# Altium PCB PCB1.PcbDoc
Units mm, origin at the board's own origin, x right, y up, seen from the top; angles counter-clockwise.
Board outline 56.7 x 32.8 mm, 4 copper layers (Top Layer, Layer 1, Layer 2, Bottom Layer), stack 1.586 mm thick; 29 components, 50 nets, 204 pads, 110 vias.
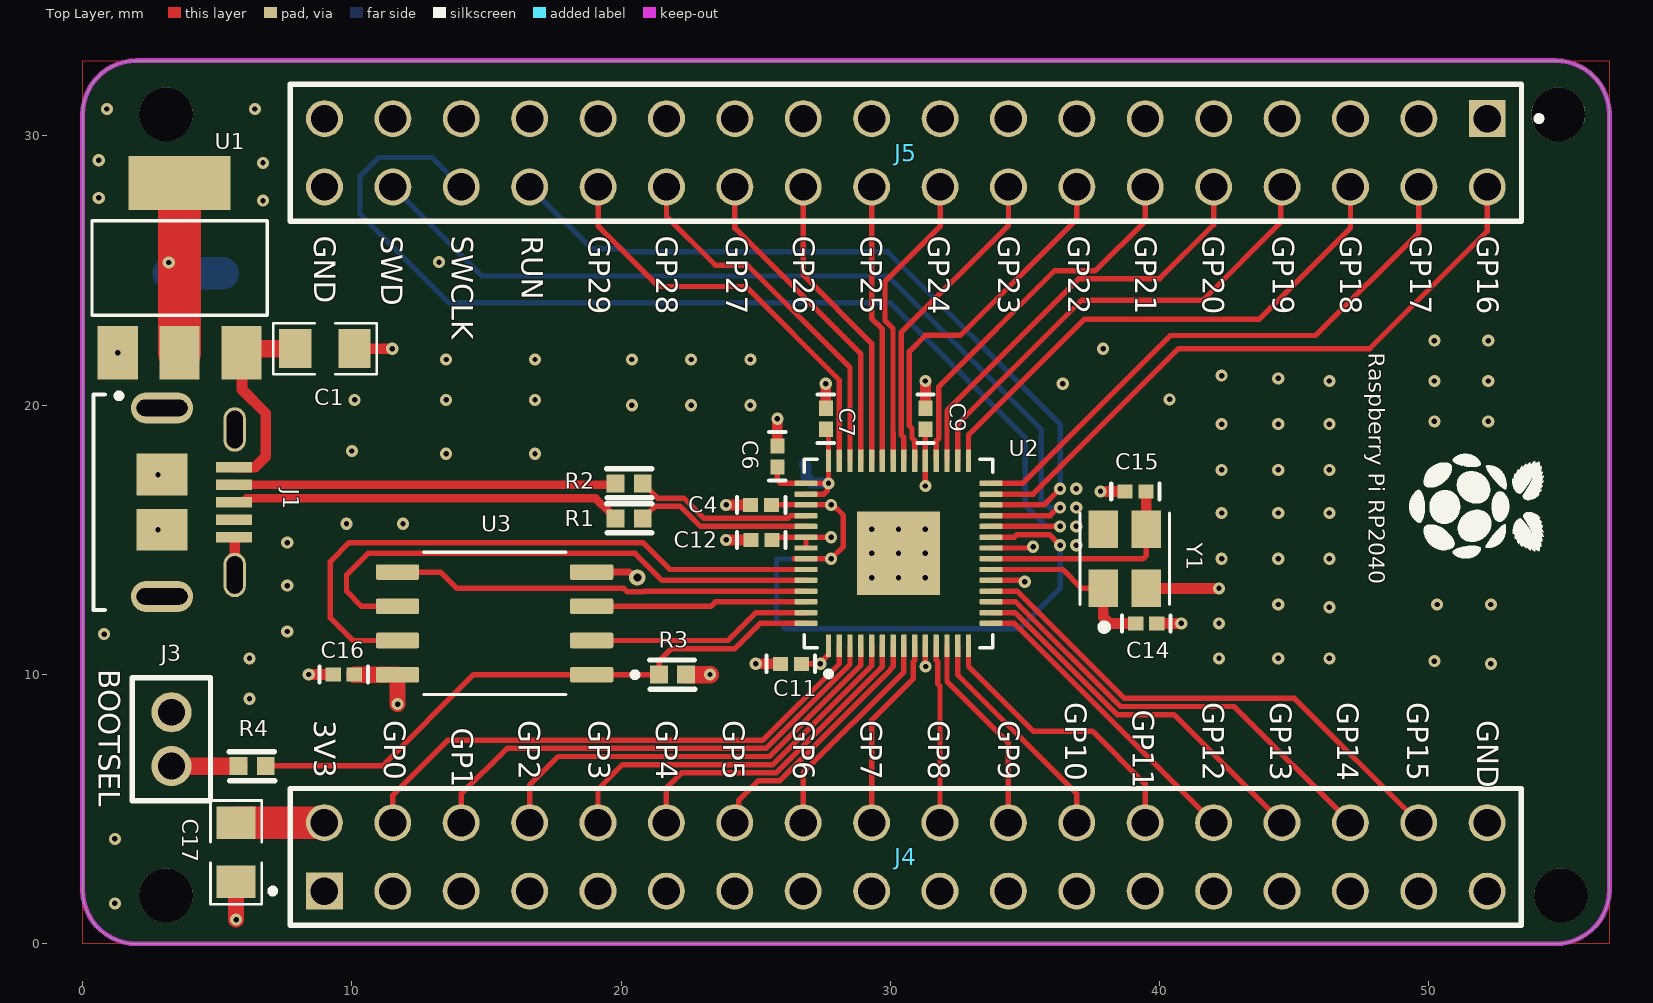
[diagram p0: Top Layer view]
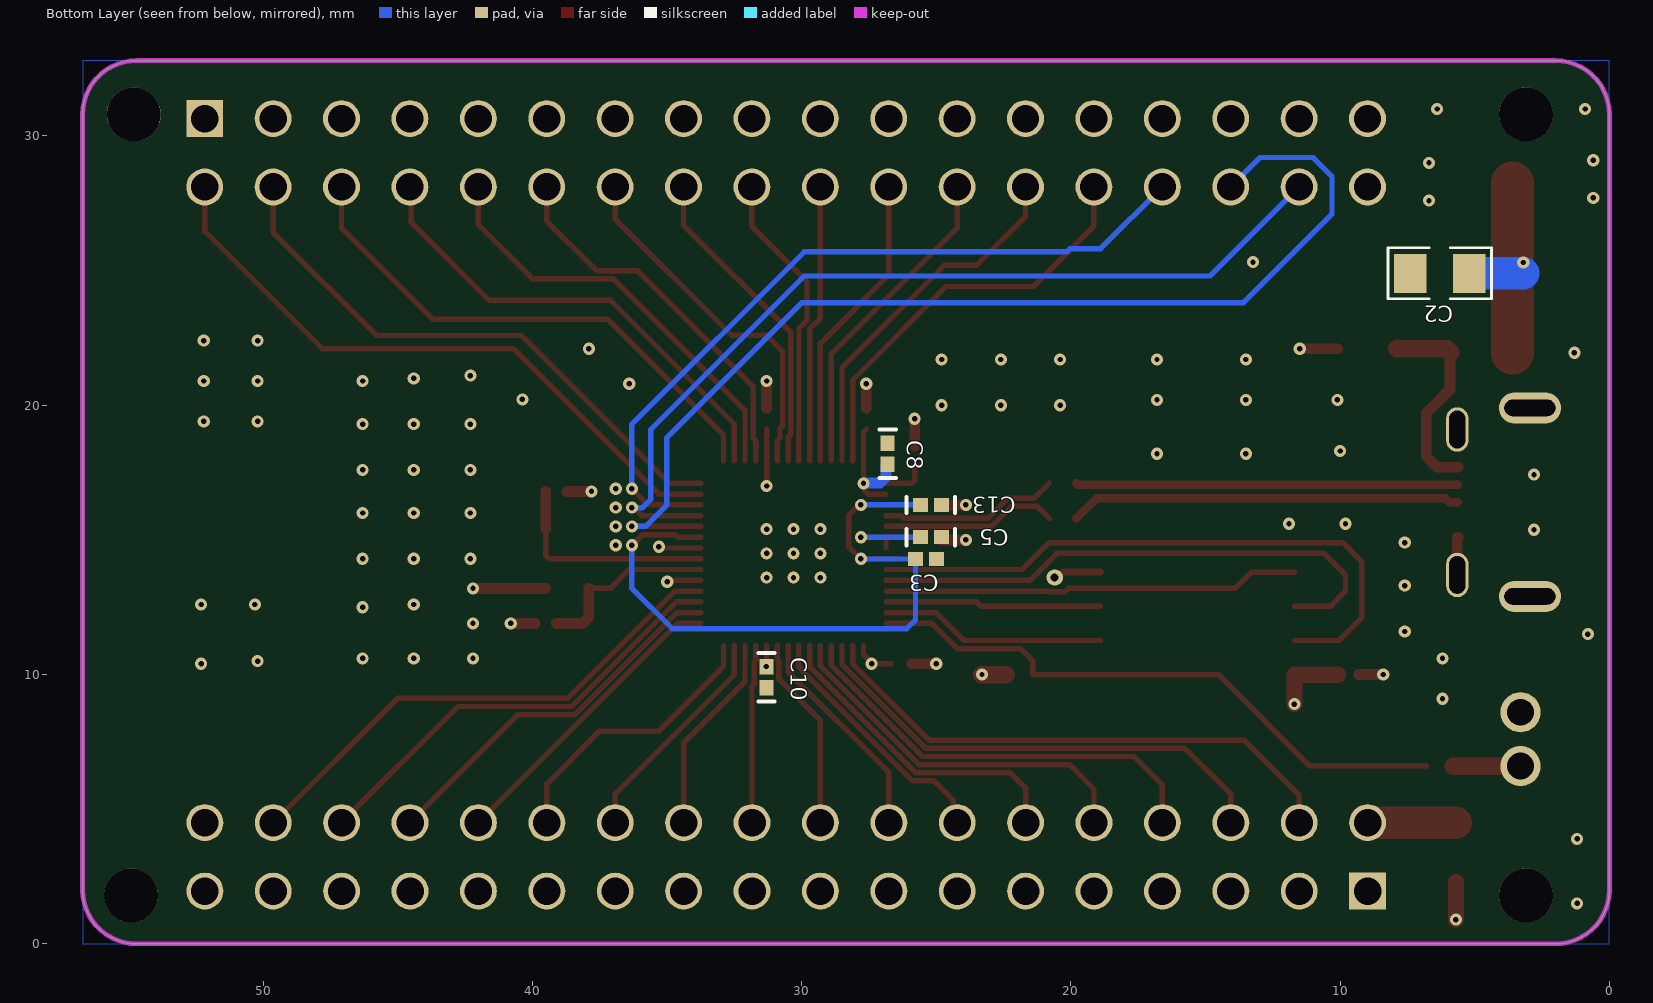
[diagram p1: Bottom Layer view, seen from below]
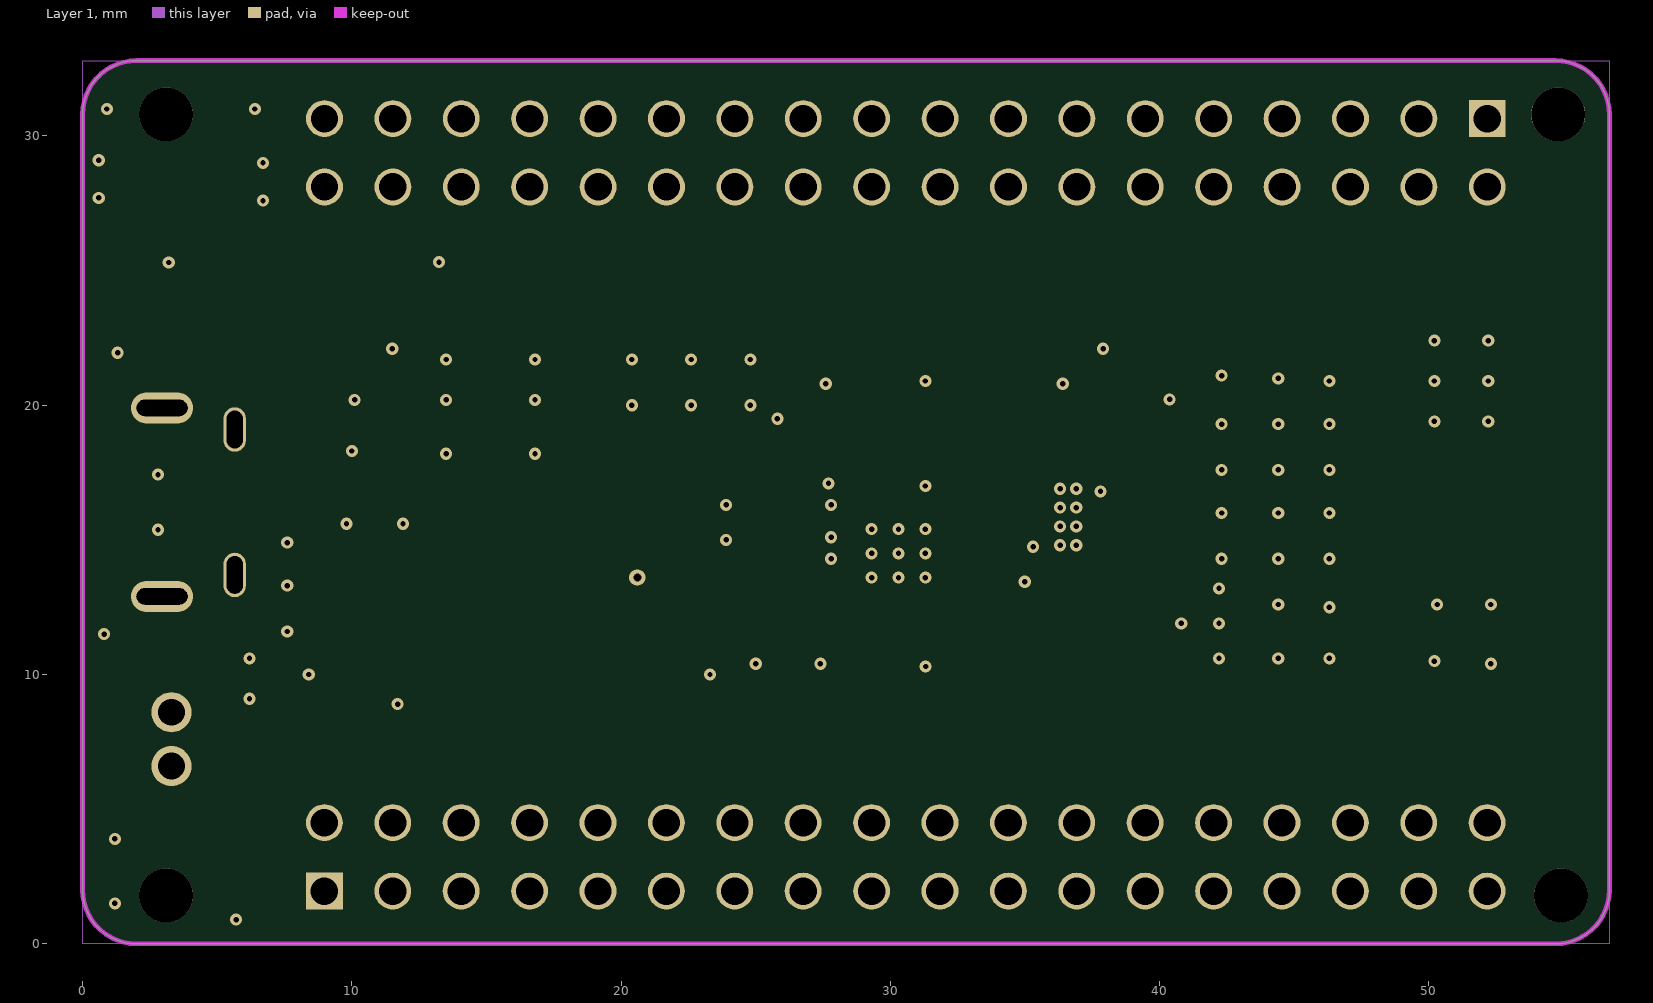
[diagram p2: Layer 1]
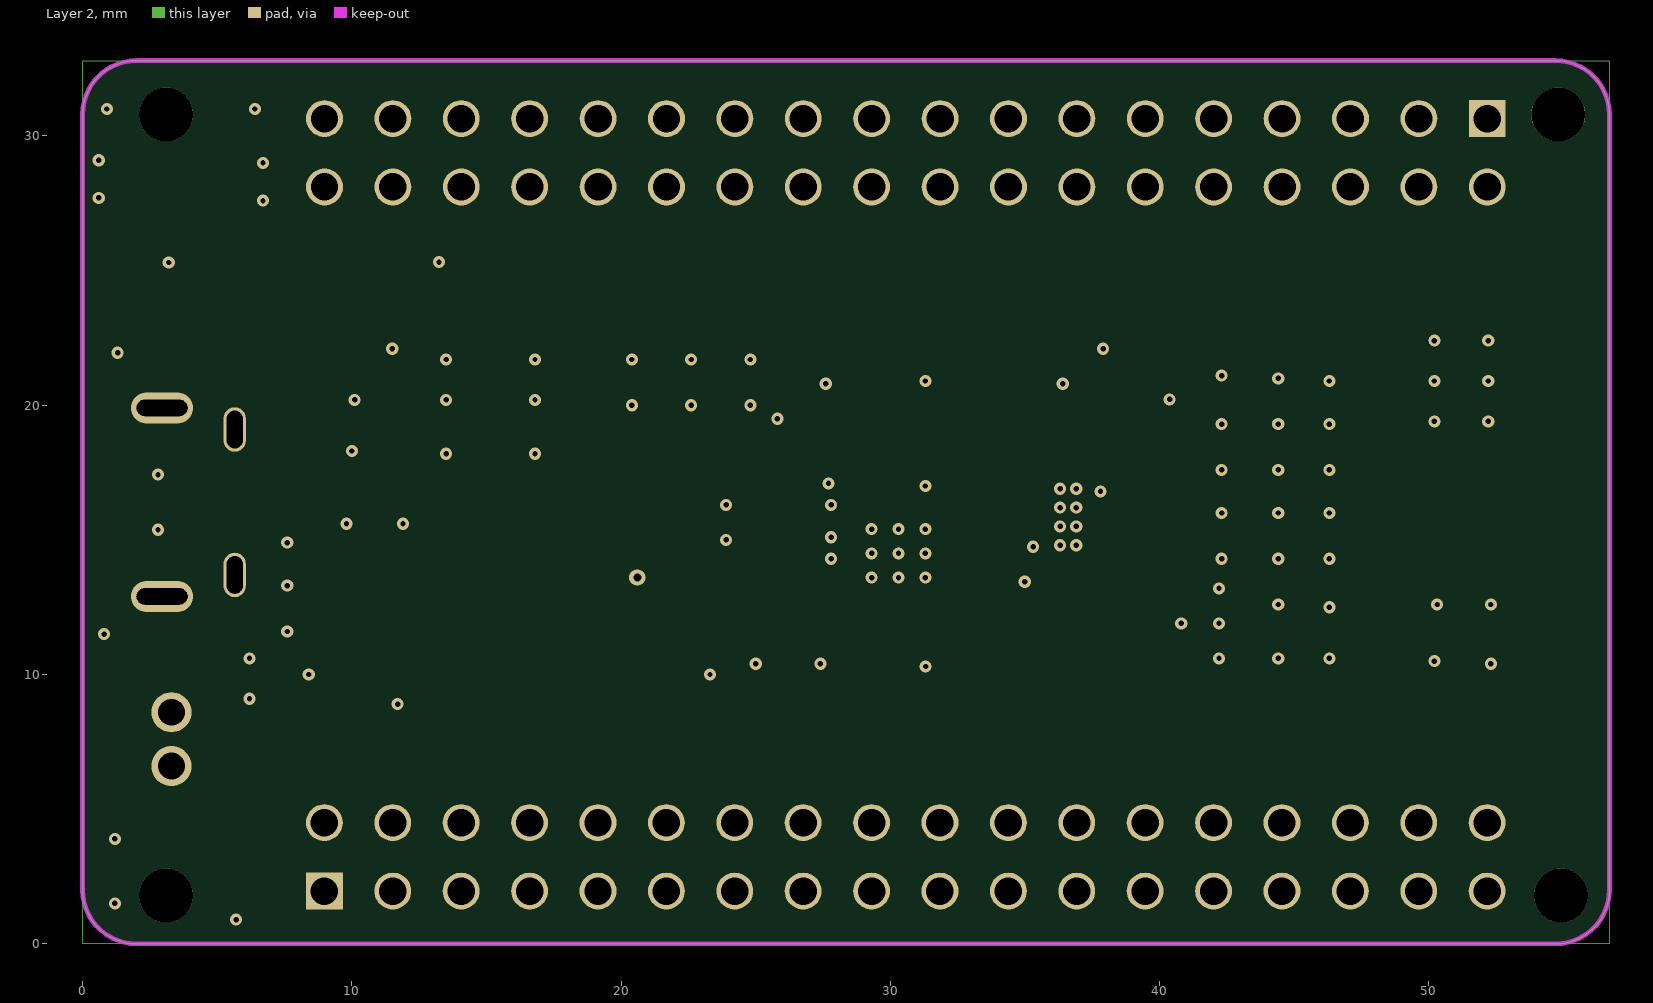
[diagram p3: Layer 2]
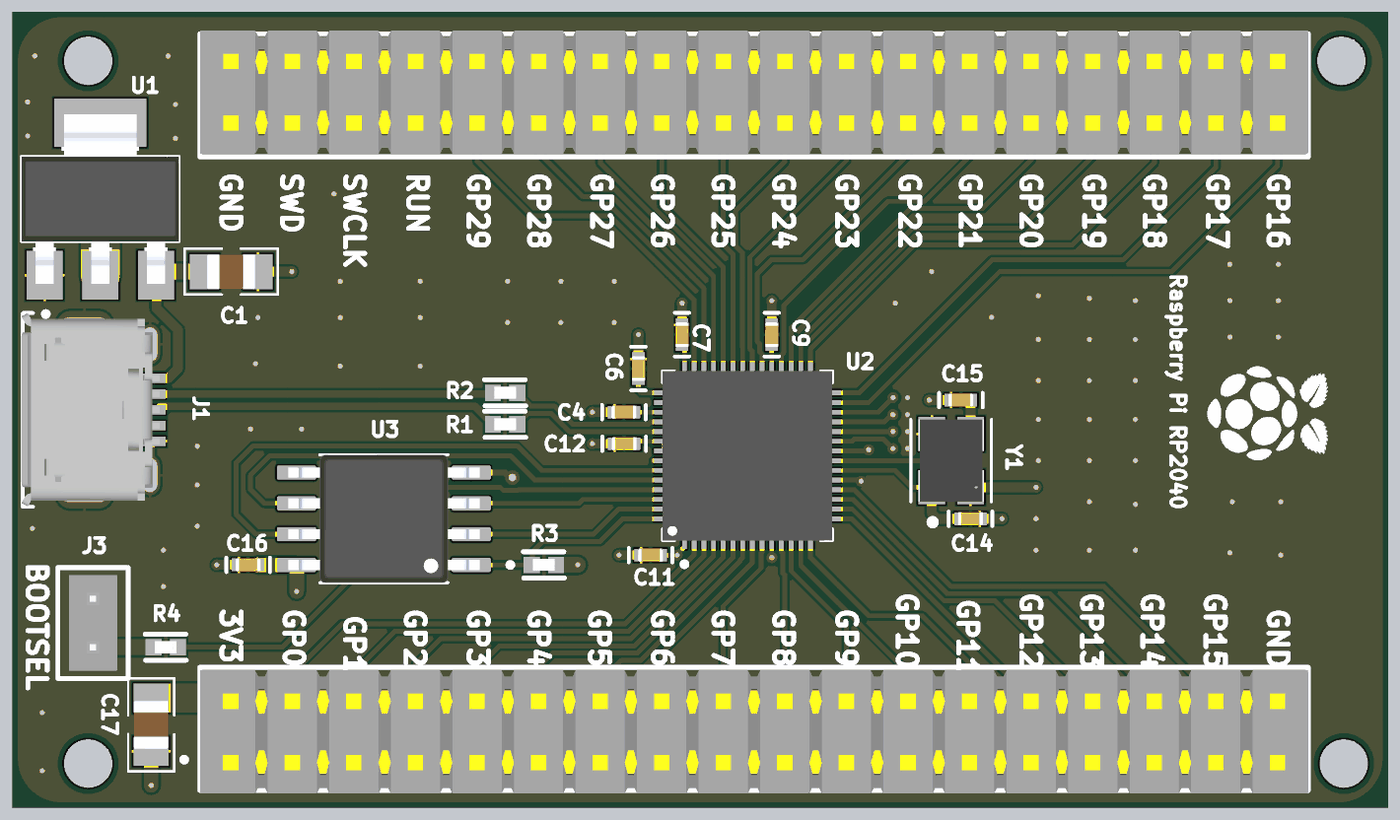
[diagram p4: 3D render of the assembled board from above, using the file's embedded part models]
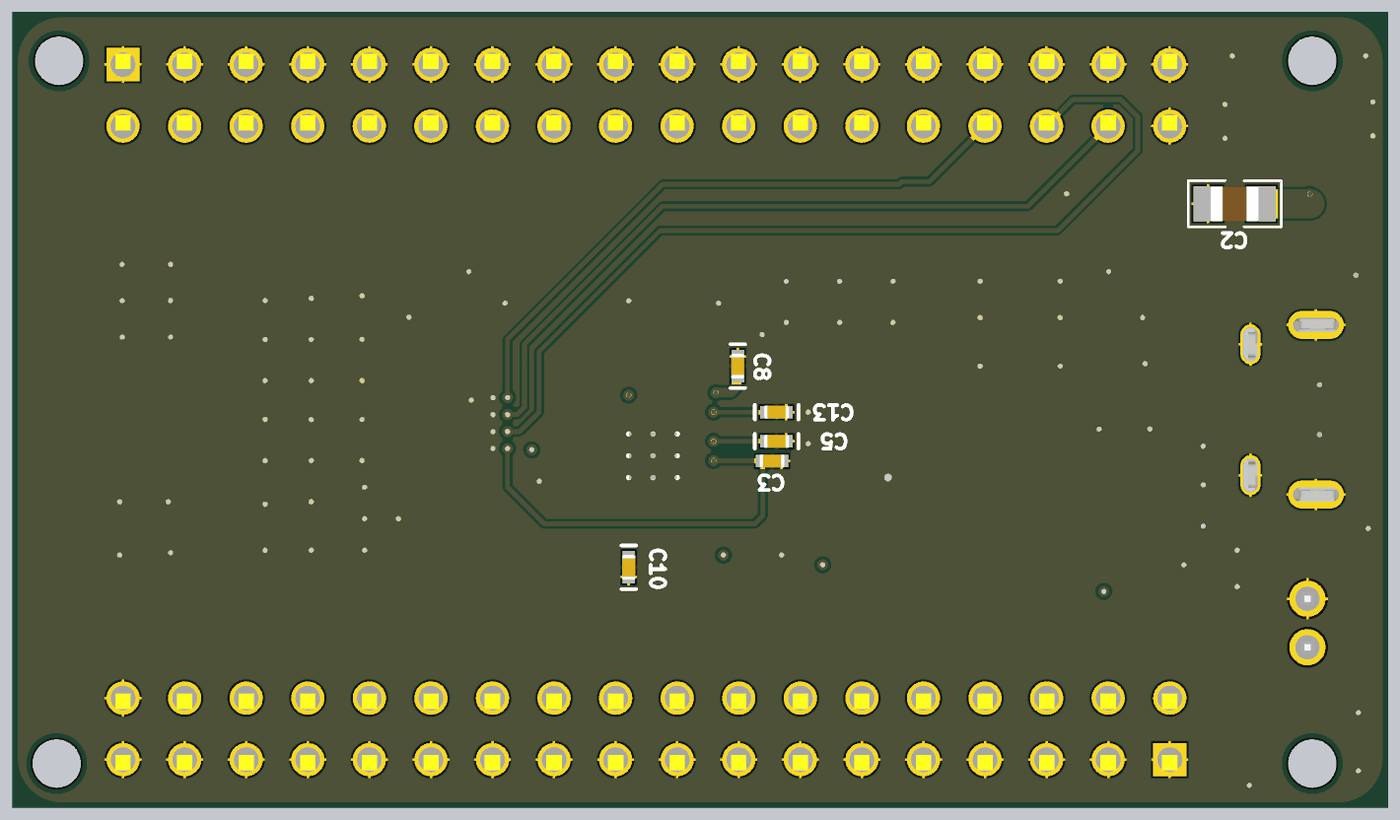
[diagram p5: 3D render of the assembled board from below, using the file's embedded part models]

## Layer stack, top to bottom
Top Solder: solder mask 0.0127, Solder Resist, Dk 3.8
Top Layer: signal copper 0.035
Dielectric 2: prepreg 0.2104, 7628, Dk 4.4
Layer 1: signal copper 0.0152
Dielectric 1: prepreg 1.065, FR-4, Dk 4.4
Layer 2: signal copper 0.0152
Dielectric 3: prepreg 0.2104, 7628, Dk 4.4
Bottom Layer: signal copper 0.035
Bottom Solder: solder mask 0.0127, Solder Resist, Dk 3.8

## Board outline
0,2 0,30.8 cw(c2,30.8) 2,32.8 54.7,32.8 cw(c54.7,30.8) 56.7,30.8 56.7,2 cw(c54.7,2) 54.7,0 2,0 cw(c2,2)

## Design rules (kind name [scope] priority, off if disabled: settings)
BoardOutlineClearance [All] p1: gap=0.2 ignorepadtopadclearanceinfootprint=FALSE
Clearance [All] p1: gap=0.102 ignorepadtopadclearanceinfootprint=FALSE except(0.127: Arc-Via Track-Via SMDPad-Via THPad-Via Via-Via Via-Fill Via-Poly Via-Region Via-Text; 0.25: Arc-Hole Track-Hole SMDPad-Hole THPad-Hole Via-Hole Fill-Hole Poly-Hole Region-Hole Text-Hole)
ComponentClearance [All] p1: gap=0.102 collisioncheckmode=3 verticalgap=0.102 showdistances=TRUE
DiffPairsRouting [InDifferentialPair('USB_D')] p1: maxlimit=0.2 minlimit=0.2 mostfreqgap=0.2 toplayer_maxgap=0.2 toplayer_prefgap=0.2 toplayer_minwidth=0.306 toplayer_maxwidth=0.306 toplayer_prefwidth=0.306 midlayer1_mingap=0.2 midlayer1_minwidth=0.215 midlayer1_maxwidth=0.215 midlayer1_prefwidth=0.215 midlayer2_mingap=0.2 midlayer2_minwidth=0.215 midlayer2_maxwidth=0.215 midlayer2_prefwidth=0.215 bottomlayer_maxgap=0.2 bottomlayer_prefgap=0.2 bottomlayer_minwidth=0.306 bottomlayer_maxwidth=0.306 bottomlayer_prefwidth=0.306 impedanceprofiledriven=TRUE impedanceprofileid={92C217A8-6386-4FA5-9285-B80EED019AAA} impedanceprofilevalue=90.000000 maxuncoupledlength=12.7
Height [All] p1: minheight=0 maxheight=1816.048 prefheight=12.7
HoleSize [All] p1: absolutevalues=TRUE maxlimit=6.3 minlimit=0.2 maxpercent=80.000 minpercent=20.000
HoleToHoleClearance [All] p1: gap=0.25 allowstackedmicrovias=FALSE
MinimumAnnularRing [All] p1: minimumring=0.076
MinimumSolderMaskSliver [All] p1: minsoldermaskwidth=0
PlaneClearance [All] p1: clearance=0.102
PlaneConnect PlaneConnectPowerPads [InPadClass('PowerPads')] p1: planeconnectstyle=Direct reliefexpansion=0.508 reliefentries=4 reliefconductorwidth=0.254 reliefairgap=0.254
PlaneConnect [All] p2: pad.planeconnectstyle=Relief pad.reliefexpansion=0.3 pad.reliefentries=4 pad.reliefconductorwidth=0.102 pad.reliefairgap=0.102 via.planeconnectstyle=Direct via.reliefexpansion=0.3 via.reliefentries=4 via.reliefconductorwidth=0.127 via.reliefairgap=0.127
PolygonConnect PolygonConnectPowerPads [All vs (InPadClass('PowerPads'))] p1: connectstyle=Direct reliefconductorwidth=0.254 reliefentries=4 polygonreliefangle="90 Angle" airgapwidth=0.254
PolygonConnect [All] p2: thpad.connectstyle=Relief thpad.reliefconductorwidth=0.102 thpad.reliefentries=4 thpad.polygonreliefangle="90 Angle" thpad.airgapwidth=0.102 smdpad.connectstyle=Relief smdpad.reliefconductorwidth=0.102 smdpad.reliefentries=4 smdpad.polygonreliefangle="90 Angle" smdpad.airgapwidth=0.102 via.connectstyle=Direct via.reliefconductorwidth=0.127 via.reliefentries=4 via.polygonreliefangle="90 Angle" via.airgapwidth=0.127
RoutingVias [All] p1: holewidth=0.2 width=0.45 viastyle="Through Hole" minholewidth=0.2 minwidth=0.45 maxholewidth=6.3 maxwidth=6.55
SilkToSilkClearance [All] p1: silktosilkclearance=0
SilkToSolderMaskClearance [IsPad] p1: minsilkscreentomaskgap=0.102 clearancetoexposedcopper=TRUE
SolderMaskExpansion [All] p1: expansion=0.075 istentingtop=FALSE
SupplyNets "Schematic Supply Nets_3" [InNet('GND')] p1: voltage=0.000
SupplyNets "Schematic Supply Nets_2" [InNet('+3V3')] p2: voltage=0.000
SupplyNets "Schematic Supply Nets_1" [InNet('+1V1')] p3: voltage=0.000
SupplyNets "Schematic Supply Nets" [InNet('VBUS')] p4: voltage=0.000
Width [All] p1: maxlimit=1816.048 minlimit=0.102 preferedwidth=0.102
20 further rules are at their usual default settings.

## Classes and differential pairs
differential pair class USB: USB_D USB_RES_D
net class GPIO[0..29]: GPIO0 GPIO1 GPIO2 GPIO3 GPIO4 GPIO5 GPIO6 GPIO7 GPIO8 GPIO9 GPIO10 GPIO11 GPIO12 GPIO13 GPIO14 GPIO15 GPIO16 GPIO17 GPIO18 GPIO19 GPIO20 GPIO21 GPIO22 GPIO23 GPIO24 GPIO25 GPIO26 GPIO27 GPIO28 GPIO29
component class U_Supply: C1 C2 J1 U1
component class U_MCU: C3 C5 C6 C7 C9 C10 C11 C12 C13 C14 C15 R1 R2 Y1
component class U_Flash: C16 J3 R3 R4 U3
component class U_Connectors: C17 J4 J5
differential pair USB_RES_D: +USB_RES_D_P -USB_RES_D_N
differential pair USB_D: +USB_D_P -USB_D_N

## Components (designator, comment, footprint, x,y, rotation, side; value= is the part's Value field where it differs from the comment)
C1 "10u" VJ0805 9,22.1 r180 top value=10uF
C2 "10u" VJ0805 6.3,24.9 r180 bottom value=10uF
C3 "100n" "0402 CAP" 25.386,14.285 r0 bottom value=100nF
C4 "100n" "0402 CAP" 25.2,16.3 r0 top value=100nF
C5 "100n" "0402 CAP" 25.2,15.1 r0 bottom value=100nF
C6 "100n" "0402 CAP" 25.8,18.1 r270 top value=100nF
C7 "100n" "0402 CAP" 27.6,19.5 r270 top value=100nF
C8 "100n" "0402 CAP" 26.8,18.2 r270 bottom value=100nF
C9 "100n" "0402 CAP" 31.3,19.5 r270 top value=100nF
C10 "100n" "0402 CAP" 31.3,9.9 r90 bottom value=100nF
C11 "100n" "0402 CAP" 26.3,10.4 r0 top value=100nF
C12 "1u" "0402 CAP" 25.21,15 r0 top value=1uF
C13 "1u" "0402 CAP" 25.2,16.3 r0 bottom value=1uF
C14 "15p" "0402 CAP" 39.5,11.9 r0 top value=15pF
C15 "15p" "0402 CAP" 39.1,16.8 r180 top value=15pF
C16 "100n" "0402 CAP" 9.7,10 r0 top value=100nF
C17 "10u" VJ0805 5.7,3.4 r90 top value=10uF
J1 "USB_B_Micro" MOLEX_1050170002 1.1,16.4 r270 top
J3 "2 Position male pin header" SAMTEC-TMM-101-03-X-D 3.3,7.6 r0 top
J4 "MTSW-118-07-T-D-150" SAMTEC_MTSW-118-07-T-D-150 8.98,1.96 r0 top
J5 "MTSW-118-07-T-D-150" SAMTEC_MTSW-118-07-T-D-150 52.164,30.646 r180 top
R1 "27R" "0402 RES" 20.3,15.8 r180 top
R2 "27R" "0402 RES" 20.3,17.1 r180 top
R3 "10k" "0402 RES" 21.9,10 r0 top
R4 "1k" "0402 RES" 6.3,6.6 r0 top value=1kR
U1 "NCP1117-3.3" VREG_NCP1117STAT3 3.6,25.1 r90 top
U2 "RP2040" QFN40P700X700X90-57N 30.3,14.5 r90 top
U3 "W25Q128JVSIQ" SOIC127P790X216-8N 15.3,11.9 r180 top
Y1 "ABM8-272-T3" ABM8-272-T3 38.7,14.3 r90 top

## Footprints (in the part's own frame and the unit in brackets; to place one, negate y for a bottom-side part, rotate by r counter-clockwise, add the part's x,y. Pads: shape width x height; smd on the part's side, far side on the other; paste and mask are expansions set on the pad)
"0402 CAP" [mm]
  rect 0.56x0.52 smd: 1(-0.39,0) 2(0.39,0)
  body extent -0.53,-0.28 0.53,0.28, height 0.55
"0402 RES" [mm]
  rect 0.668x0.672 smd paste+0 mask+0: 1(-0.502,0) 2(0.502,0)
  silkscreen extent -0.85,-0.54 0.84,0.54, body extent -1.04,-0.54 1.04,0.54, height 0.25
ABM8-272-T3 [mm]
  rect 1.4x1.1 smd: 1(-1.1,0.8) 2(-1.1,-0.8) 3(1.1,-0.8) 4(1.1,0.8)
  silkscreen extent -2.67,-1.66 1.7,1.66, body extent -1.7,-1.35 1.7,1.35, height 0.76
MOLEX_1050170002 [mm]
  rect 0.4x1.35 smd mask+0.064: 1(-1.3,4.525) 2(-0.65,4.525) 3(0,4.525) 4(0.65,4.525) 5(1.3,4.525)
  oval 1.65x0.825 hole 0.6 slot 1.4 at 0 deg mask+0: SH1(-2.7,4.55) SH3(2.7,4.55)
  oval 1.15x2.3 hole 0.6 slot 1.9 at 90 deg mask+0: SH2(-3.5,1.85) SH4(3.5,1.85)
  rect 1.55x1.9 smd mask+0.064: SH5(-1.025,1.85) SH6(1.025,1.85)
  silkscreen extent -3.99,-0.7 4,-0.28, body extent -4,-0.76 4,4.95, height 2.75
QFN40P700X700X90-57N [mm]
  rrect25% 0.84x0.2 smd: 1(-3.435,2.6) 2(-3.435,2.2) 3(-3.435,1.8) 4(-3.435,1.4) 5(-3.435,1) 6(-3.435,0.6) 7(-3.435,0.2) 8(-3.435,-0.2) 9(-3.435,-0.6) 10(-3.435,-1) 11(-3.435,-1.4) 12(-3.435,-1.8) 13(-3.435,-2.2) 14(-3.435,-2.6) 29(3.435,-2.6) 30(3.435,-2.2) 31(3.435,-1.8) 32(3.435,-1.4) 33(3.435,-1) 34(3.435,-0.6) 35(3.435,-0.2) 36(3.435,0.2) 37(3.435,0.6) 38(3.435,1) 39(3.435,1.4) 40(3.435,1.8) 41(3.435,2.2) 42(3.435,2.6)
  rrect25% 0.2x0.84 smd: 15(-2.6,-3.435) 16(-2.2,-3.435) 17(-1.8,-3.435) 18(-1.4,-3.435) 19(-1,-3.435) 20(-0.6,-3.435) 21(-0.2,-3.435) 22(0.2,-3.435) 23(0.6,-3.435) 24(1,-3.435) 25(1.4,-3.435) 26(1.8,-3.435) 27(2.2,-3.435) 28(2.6,-3.435) 43(2.6,3.435) 44(2.2,3.435) 45(1.8,3.435) 46(1.4,3.435) 47(1,3.435) 48(0.6,3.435) 49(0.2,3.435) 50(-0.2,3.435) 51(-0.6,3.435) 52(-1,3.435) 53(-1.4,3.435) 54(-1.8,3.435) 55(-2.2,3.435) 56(-2.6,3.435)
  rect 3.1x3.1 smd paste-0.57: 57(0,0)
  silkscreen extent -4.57,-3.5 3.5,3.5, body extent -3.5,-3.5 3.5,3.5, height 0.9
SAMTEC-TMM-101-03-X-D [mm]
  round 1.49 hole 1: 1(0,-1) 2(0,1)
  silkscreen extent -1.45,-2.29 1.45,2.29, body extent -1,-1.97 1,1.97, height 5.51
SAMTEC_MTSW-118-07-T-D-150 [mm]
  rect 1.37x1.37 hole 1.02: 01(0,0)
  round 1.37 hole 1.02: 02(0,2.54) 03(2.54,0) 04(2.54,2.54) 05(5.08,0) 06(5.08,2.54) 07(7.62,0) 08(7.62,2.54) 09(10.16,0) 10(10.16,2.54) 11(12.7,0) 12(12.7,2.54) 13(15.24,0) 14(15.24,2.54) 15(17.78,0) 16(17.78,2.54) 17(20.32,0) 18(20.32,2.54) 19(22.86,0) 20(22.86,2.54) 21(25.4,0) 22(25.4,2.54) 23(27.94,0) 24(27.94,2.54) 25(30.48,0) 26(30.48,2.54) 27(33.02,0) 28(33.02,2.54) 29(35.56,0) 30(35.56,2.54) 31(38.1,0) 32(38.1,2.54) 33(40.64,0) 34(40.64,2.54) 35(43.18,0) 36(43.18,2.54)
  silkscreen extent -2.02,-1.27 44.45,3.81, body extent -1.27,-1.4 44.45,3.68, height 6.35
SOIC127P790X216-8N [mm]
  rrect25% 1.61x0.58 smd: 1(-3.605,1.905) 2(-3.605,0.635) 3(-3.605,-0.635) 4(-3.605,-1.905) 5(3.605,-1.905) 6(3.605,-0.635) 7(3.605,0.635) 8(3.605,1.905)
  silkscreen extent -5.32,-2.64 2.64,2.64, body extent -3.95,-2.64 3.95,2.64, height 2.16
VJ0805 [mm] "General footprint for 2012(0805) SMD Capacitors"
  rect 1.2x1.45 smd: 1(-1.1,0) 2(1.1,0)
  silkscreen extent -1.92,-0.95 1.92,0.95, body extent -1,-0.72 1,0.72, height 1.22
VREG_NCP1117STAT3 [mm]
  rect 2x1.5 smd: 1(-3.15,2.3) 2(-3.15,0) 3(-3.15,-2.3)
  rect 2x3.8 smd: 4(3.15,0)
  silkscreen extent -4.85,-3.25 1.75,3.25, body extent -3.5,-3.25 3.5,3.25, height 1.8

## Part data
C1 C2 C17: library part "0805 SMD Capacitor", "Ceramic Capacitor, Multilayer, Ceramic, 25V, 10% +Tol, 10% -Tol, X5R, 15% TC, 10uF, Surface Mount, 0805", Capacitor Type=Ceramic, Case/Package=0805, Manufacturer=Murata, Manufacturer Part Number=GRM21BR61E106KA73K, Max Operating Temperature=85°C, Min Operating Temperature=-55°C, Package Shape=Rectangular, Package Style=SMTMeter, Rated DC Voltage (URdc)=25V, Supplier Part Number=9092991, Temperature Characteristics Code=X5R, Tolerance  (fill in as +-)=10%, Category="Ceramic Capacitors", ComponentLink1Description=Link, ComponentLink2Description=https://datasheet.ciiva.com:443/pdfs/VipMasterIC/IC/MURE/MURE-S-A0004349797/MURE-S-A0004361627-1.pdf?src-supplier=IHS+Markit, ComponentLink2URL=https://datasheet.ciiva.com:443/pdfs/VipMasterIC/IC/MURE/MURE-S-A0004349797/MURE-S-A0004361627-1.pdf?src-supplier=IHS+Markit, ComponentLink3Description=http://www.mouser.com/ds/2/281/c02e-2905.pdf?src-supplier=Mouser, ComponentLink3URL=http://www.mouser.com/ds/2/281/c02e-2905.pdf?src-supplier=Mouser, ComponentLink4Description=https://datasheet.octopart.com/GRM21BR61E106KA73K-Murata-datasheet-149523495.pdf?src-supplier=Newark, ComponentLink4URL=https://datasheet.octopart.com/GRM21BR61E106KA73K-Murata-datasheet-149523495.pdf?src-supplier=Newark, ComponentLink5Description=https://datasheet.octopart.com/GRM21BR61E106KA73K-Murata-datasheet-99353849.pdf?src-supplier=Future+Electronics, ComponentLink5URL=https://datasheet.octopart.com/GRM21BR61E106KA73K-Murata-datasheet-99353849.pdf?src-supplier=Future+Electronics, ComponentLink6Description=http://search.murata.co.jp/Ceramy/image/img/A01X/G101/ENG/GRM21BR61E106KA73-01.pdf?src-supplier=Digikey, ComponentLink6URL=http://search.murata.co.jp/Ceramy/image/img/A01X/G101/ENG/GRM21BR61E106KA73-01.pdf?src-supplier=Digikey, ComponentLink7Description=https://search.murata.co.jp/Ceramy/image/img/A01X/G101/ENG/GRM21BR61E106KA73-01.pdf?src-supplier=Digikey, ComponentLink7URL=https://search.murata.co.jp/Ceramy/image/img/A01X/G101/ENG/GRM21BR61E106KA73-01.pdf?src-supplier=Digikey, ComponentLink8Description=https://datasheet.octopart.com/GRM21BR61E106KA73K-Murata-datasheet-165579666.pdf?src-supplier=TME, ComponentLink8URL=https://datasheet.octopart.com/GRM21BR61E106KA73K-Murata-datasheet-165579666.pdf?src-supplier=TME, Dielectric Material=Ceramic, Height=1.25mm, JESD-609 Code=e3, Length=2mm, Mounting Technology="Surface Mount", Multilayer=Yes, Packaging="Tape and Reel", Pins=2, Pricing="10000=0.0248, 20000=0.0245, 30000=0.0242, 40000=0.0241, 50000=0.0236 (USD)", Reach SVHC Compliant=Yes, RoHS=Yes, RoHS Compliant=Yes, Stock=40000, Supplier="Future Electronics", Terminal Finish=Nickel, Termination=Wraparound, Tolerance (fill in as +-)=10%, Width=1.25mm
C3 C4 C5 C6 C7 C8 C9 C10 C11 C16: library part "0402 SMD Capacitor", "Ceramic Capacitor, Multilayer, Ceramic, 16V, 10% +Tol, 10% -Tol, X7R, 15% TC, 0.1uF, Surface Mount, 0805", Capacitor Type=Ceramic, Case/Package=0805, Manufacturer=KEMET, Manufacturer Part Number=C0805C104K4RACTU, Max Operating Temperature=125°C, Min Operating Temperature=-55°C, Package Shape=Rectangular, Rated DC Voltage (URdc)=16V, Supplier Part Number=80-C0805C104K4R, Temperature Characteristics Code=X7R, Tolerance  (fill in as +-)=10%, Category="Ceramic Capacitors", ComponentLink1Description=Link, ComponentLink2Description=https://datasheet.ciiva.com:443/pdfs/VipMasterIC/IC/KEME/KEME-S-A0006434815/KEME-S-A0006434815-1.pdf?src-supplier=IHS+Markit, ComponentLink2URL=https://datasheet.ciiva.com:443/pdfs/VipMasterIC/IC/KEME/KEME-S-A0006434815/KEME-S-A0006434815-1.pdf?src-supplier=IHS+Markit, ComponentLink3Description=https://datasheet.ciiva.com/46443/1851736-46443711.pdf?src-supplier=Element14, ComponentLink3URL=https://datasheet.ciiva.com/46443/1851736-46443711.pdf?src-supplier=Element14, ComponentLink4Description=https://datasheet.ciiva.com/46443/1851736-46443710.pdf?src-supplier=Element14, ComponentLink4URL=https://datasheet.ciiva.com/46443/1851736-46443710.pdf?src-supplier=Element14, Dielectric Material=Ceramic, JESD-609 Code=e3, Mounting Technology="Surface Mount", Multilayer=Yes, Packaging="Tape and Reel", Pins=2, Pricing="1=0.16, 10=0.078, 50=0.078, 100=0.045, 1000=0.034, 10000=0.024 (USD)", Reach SVHC Compliant=Yes, RoHS=Yes, RoHS Compliant=Yes, Stock=114893, Supplier=Mouser, Terminal Finish=Nickel, Termination=Wraparound, Tolerance (fill in as +-)=10%
C12 C13: library part "0402 SMD Capacitor", "Ceramic Capacitor, Multilayer, Ceramic, 16V, 10% +Tol, 10% -Tol, X7R, 15% TC, 1uF, Surface Mount, 0805", Capacitor Type=Ceramic, Case/Package=0805, Manufacturer=KEMET, Manufacturer Part Number=C0805C105K4RACTU, Max Operating Temperature=125°C, Min Operating Temperature=-55°C, Package Shape=Rectangular, Package Style=SMTMeter, Rated DC Voltage (URdc)=16V, Supplier Part Number=80-C0805C105K4R, Temperature Characteristics Code=X7R, Tolerance  (fill in as +-)=10%, Category="Ceramic Capacitors", ComponentLink1Description=Link, ComponentLink2Description=https://datasheet.ciiva.com:443/pdfs/VipMasterIC/IC/KEME/KEME-S-A0008991654/KEME-S-A0008991654-1.pdf?src-supplier=IHS+Markit, ComponentLink2URL=https://datasheet.ciiva.com:443/pdfs/VipMasterIC/IC/KEME/KEME-S-A0008991654/KEME-S-A0008991654-1.pdf?src-supplier=IHS+Markit, ComponentLink3Description=https://datasheet.ciiva.com/6074/1722731-6074364.pdf?src-supplier=Farnell, ComponentLink3URL=https://datasheet.ciiva.com/6074/1722731-6074364.pdf?src-supplier=Farnell, ComponentLink4Description=https://datasheet.ciiva.com/28692/1851736-28692942.pdf?src-supplier=Element14, ComponentLink4URL=https://datasheet.ciiva.com/28692/1851736-28692942.pdf?src-supplier=Element14, ComponentLink5Description=https://datasheet.ciiva.com/14585/70095383-14585511.pdf?src-supplier=Allied+Electronics, ComponentLink5URL=https://datasheet.ciiva.com/14585/70095383-14585511.pdf?src-supplier=Allied+Electronics, ComponentLink6Description=https://datasheet.ciiva.com/14603/70095383-14603388.pdf?src-supplier=Allied+Electronics, ComponentLink6URL=https://datasheet.ciiva.com/14603/70095383-14603388.pdf?src-supplier=Allied+Electronics, ComponentLink7Description=https://datasheet.ciiva.com/45846/docfinderpartnumberc0402c102k5ractu-45846934.pdf?src-supplier=Onlinecomponents.com, ComponentLink7URL=https://datasheet.ciiva.com/45846/docfinderpartnumberc0402c102k5ractu-45846934.pdf?src-supplier=Onlinecomponents.com, Dielectric Material=Ceramic, Height=0.9mm, JESD-609 Code=e3, Length=2mm, Mounting Technology="Surface Mount", Multilayer=Yes, Packaging="Tape and Reel", Pins=2, Pricing="1=0.11, 10=0.07, 50=0.07, 100=0.046, 1000=0.041, 10000=0.018 (USD)", Reach SVHC Compliant=Yes, RoHS=Yes, RoHS Compliant=Yes, Stock=298617, Supplier=Mouser, Terminal Finish=Nickel, Termination=Wraparound, Tolerance (fill in as +-)=10%, Width=1.25mm
C14 C15: library part "0402 SMD Capacitor", "Ceramic Capacitor, Multilayer, Ceramic, 50V, 1% +Tol, 1% -Tol, C0G, 30ppm/Cel TC, 0.000015uF, Surface Mount, 0805", Capacitor Type=Ceramic, Case/Package=0805, Manufacturer=Yageo, Manufacturer Part Number=CC0805FRNPO9BN150, Max Operating Temperature=125°C, Min Operating Temperature=-55°C, Package Shape=Rectangular, Package Style=SMTMeter, Rated DC Voltage (URdc)=50V, Supplier Part Number=8396681, Temperature Characteristics Code=C0G, Tolerance  (fill in as +-)=1%, Category="Ceramic Capacitors", ComponentLink1Description=Link, ComponentLink2Description=https://datasheet.ciiva.com:443/pdfs/VipMasterIC/IC/YAGO/YAGO-S-A0009251638/YAGO-S-A0009251638-1.pdf?src-supplier=IHS+Markit, ComponentLink2URL=https://datasheet.ciiva.com:443/pdfs/VipMasterIC/IC/YAGO/YAGO-S-A0009251638/YAGO-S-A0009251638-1.pdf?src-supplier=IHS+Markit, ComponentLink3Description=https://datasheet.ciiva.com/26862/getdatasheetpartid-251794-26862901.pdf?src-supplier=Verical, ComponentLink3URL=https://datasheet.ciiva.com/26862/getdatasheetpartid-251794-26862901.pdf?src-supplier=Verical, Dielectric Material=Ceramic, Height=0.6mm, JESD-609 Code=e3, Length=2mm, Mounting Technology="Surface Mount", Multilayer=Yes, Packaging="Tape and Reel", Pins=2, Pricing="4000=0.0258, 12000=0.0252, 20000=0.0249, 60000=0.0243, 100000=0.0238 (USD)", Reach SVHC Compliant=Yes, RoHS=Yes, RoHS Compliant=Yes, Stock=8000, Supplier="Future Electronics", Terminal Finish=Nickel, Termination=Wraparound, Tolerance (fill in as +-)=1%, Width=1.25mm
J1: "Micro-USB B Receptacle, Bottom Mount, Surface Mount with Solder Tabs, Lead-Free", Package=None, Check_prices=https://www.snapeda.com/parts/1050170002/Molex/view-part/?ref=eda, MF=Molex, MP=1050170002, SnapEDA_Link=https://www.snapeda.com/parts/1050170002/Molex/view-part/?ref=snap
J3: library part SAMTEC-TMM-101-03-X-D
J4 J5: Package=None, Availability=Unavailable, MP=MTSW-118-07-T-D-150, Price=None
R1 R2: library part "0402 SMD Resistor", "Fixed Resistor, Thin Film, 0.125W, 27ohm, 150V, 0.1% +/-Tol, 25ppm/Cel, Surface Mount, 0805", Case/Package=0805, Manufacturer=Yageo, Manufacturer Part Number=RT0805BRD0727RL, Max Operating Temperature=155°C, Min Operating Temperature=-55°C, Package Height=0.5mm, Package Length=2mm, Package Style=SMTMeter, Package Width=1.25mm, Power=125mW, Rated Temperature=70°C, Resistor Type="FIXED RESISTOR", Supplier Part Number=13-RT0805BRD0727RLCT-ND, Temperature Coefficient=25ppm/°C, Working Voltage=150V, Additional Feature="HIGH PRECISION", Category="Chip SMD Resistors", ComponentLink1Description=Link, ComponentLink2Description=https://datasheet.ciiva.com:443/pdfs/VipMasterIC/IC/YAGO/YAGO-S-A0008510989/YAGO-S-A0008510989-1.pdf?src-supplier=IHS+Markit, ComponentLink2URL=https://datasheet.ciiva.com:443/pdfs/VipMasterIC/IC/YAGO/YAGO-S-A0008510989/YAGO-S-A0008510989-1.pdf?src-supplier=IHS+Markit, ComponentLink3Description=https://datasheet.ciiva.com/2584/pyu-rt-1-to-0-05-rohs-l-5-2584897.pdf?src-supplier=Digikey, ComponentLink3URL=https://datasheet.ciiva.com/2584/pyu-rt-1-to-0-05-rohs-l-5-2584897.pdf?src-supplier=Digikey, ComponentLink4Description=https://datasheet.ciiva.com/12704/pyu-rt-1-to-0-05-rohs-l-4-12704026.pdf?src-supplier=Mouser, ComponentLink4URL=https://datasheet.ciiva.com/12704/pyu-rt-1-to-0-05-rohs-l-4-12704026.pdf?src-supplier=Mouser, Construction=Chip, Mounting Technology="Surface Mount", Packaging="Tape and Reel", Pins=2, Pricing="1=0.16, 10=0.122, 50=0.0968, 100=0.0867, 500=0.0663, 1000=0.05814 (USD)", Reach SVHC Compliant=Yes, RoHS=Yes, RoHS Compliant=Yes, Stock=1042, Supplier=Digikey, Technology="THIN FILM", Termination=Wraparound
R3: library part "0402 SMD Resistor", "Fixed Resistor, Metal Glaze/thick Film, 0.125W, 10000ohm, 150V, 10% +/-Tol, 100ppm/Cel, Surface Mount, 0805", Manufacturer=Yageo, Manufacturer Part Number=SR0805KR-0710KL, Supplier Part Number=13-SR0805KR-0710KLCT-ND, Category="Chip SMD Resistors", ComponentLink1Description=Link, ComponentLink2Description=https://datasheet.ciiva.com:443/pdfs/VipMasterIC/IC/YAGO/YAGO-S-A0006645500/YAGO-S-A0006645500-1.pdf?src-supplier=IHS+Markit, ComponentLink2URL=https://datasheet.ciiva.com:443/pdfs/VipMasterIC/IC/YAGO/YAGO-S-A0006645500/YAGO-S-A0006645500-1.pdf?src-supplier=IHS+Markit, ComponentLink3Description=http://www.yageo.com/documents/recent/PYu-SR_20105_RoHS_L_5.pdf?src-supplier=Digikey, ComponentLink3URL=http://www.yageo.com/documents/recent/PYu-SR_20105_RoHS_L_5.pdf?src-supplier=Digikey, Pricing="1=0.15, 10=0.08, 50=0.0632, 100=0.0469, 500=0.03468, 1000=0.0306 (USD)", RoHS=Yes, Stock=10000, Supplier=Digikey
R4: library part "0402 SMD Resistor", "Fixed Resistor, Metal Glaze/thick Film, 0.125W, 1000ohm, 150V, 1% +/-Tol, 100ppm/Cel, Surface Mount, 0805", Case/Package=0805, Manufacturer=Yageo, Manufacturer Part Number=RC0805FR-071KL, Max Operating Temperature=155°C, Min Operating Temperature=-55°C, Package Height=0.5mm, Package Length=2mm, Package Shape=Rectangular, Package Style=SMTMeter, Package Width=1.25mm, Power=125mW, Rated Temperature=70°C, Resistor Type="FIXED RESISTOR", Supplier Part Number=8126013, Temperature Coefficient=100ppm/°C, Working Voltage=150V, Additional Feature="LASER TRIMMABLE", Category="Chip SMD Resistors", ComponentLink1Description=Link, ComponentLink2Description=https://datasheet.ciiva.com:443/pdfs/VipMasterIC/IC/YAGO/YAGO-S-A0008145938/YAGO-S-A0008145938-1.pdf?src-supplier=IHS+Markit, ComponentLink2URL=https://datasheet.ciiva.com:443/pdfs/VipMasterIC/IC/YAGO/YAGO-S-A0008145938/YAGO-S-A0008145938-1.pdf?src-supplier=IHS+Markit, ComponentLink3Description=https://datasheet.ciiva.com/7941/1686128-7941719.pdf?src-supplier=Element14, ComponentLink3URL=https://datasheet.ciiva.com/7941/1686128-7941719.pdf?src-supplier=Element14, Construction=Chip, JESD-609 Code=e3, Mounting Technology="Surface Mount", Packaging="Tape and Reel", Pins=2, Pricing="5000=0.0028, 25000=0.0027, 100000=0.0026, 250000=0.0025, 625000=0.0024 (USD)", Reach SVHC Compliant=Yes, RoHS=Yes, RoHS Compliant=Yes, Stock=1400000, Supplier="Future Electronics", Technology="METAL GLAZE/THICK FILM", Terminal Finish=Nickel, Termination=Wraparound
U1: "Linear Voltage Regulator IC Positive Adjustable 1 Output 1A SOT-223", Package=None, Availability="In Stock", Check_prices=https://www.snapeda.com/parts/NCP1117STAT3/Onsemi/view-part/?ref=eda, MF="ON Semiconductor", MP=NCP1117STAT3, Price=None, Purchase-URL=https://pricing.snapeda.com/search/part/NCP1117STAT3/?ref=eda, SnapEDA_Link=https://www.snapeda.com/parts/NCP1117STAT3/Onsemi/view-part/?ref=snap
U2: "RP2040 chip for Raspberry Pi Pico - ARM® Cortex®-M0+ MCU 32-Bit", Package=None, Check_prices=https://www.snapeda.com/parts/RP2040/Raspberry+Pi/view-part/?ref=eda, MF="Raspberry Pi", MP=RP2040, SnapEDA_Link=https://www.snapeda.com/parts/RP2040/Raspberry+Pi/view-part/?ref=snap
U3: "FLASH - NOR Memory IC 128Mb (16M x 8) SPI - Quad I/O, QPI, DTR 133 MHz 8-SOIC", Package="SOIC-8 Winbond", Availability="In Stock", Check_prices=https://www.snapeda.com/parts/W25Q128JVSIQ/Winbond+Electronics/view-part/?ref=eda, MF="Winbond Electronics", MP=W25Q128JVSIQ, Price=None, Purchase-URL=https://pricing.snapeda.com/search/part/W25Q128JVSIQ/?ref=eda, SnapEDA_Link=https://www.snapeda.com/parts/W25Q128JVSIQ/Winbond+Electronics/view-part/?ref=snap
Y1: "12 MHz Â±30ppm Crystal 10pF 50 Ohms 4-SMD, No Lead", Package="SMD-4 Abracon", Check_prices=https://www.snapeda.com/parts/ABM8-272-T3/Abracon/view-part/?ref=eda, MF=ABRACON, MP=ABM8-272-T3, SnapEDA_Link=https://www.snapeda.com/parts/ABM8-272-T3/Abracon/view-part/?ref=snap

## Free pads (board coordinates)
  round 2 hole 2 unplated: 1(3.1,30.8) 2(54.8,30.8) 3(3.1,1.8) 4(54.9,1.8)

## Via types
v1: diameter 0.45, hole 0.2, Top Layer to Bottom Layer, tented both sides, 109 vias
v2: diameter 0.6, hole 0.3, Top Layer to Bottom Layer, tented both sides, 1 vias

## Nets (pads, with @x,y where several pads share a name; then routed paths per layer and width w, separated by ;. In a path a pad name is that pad's centre, name@x,y a point inside that pad or via, vN(x,y) a via of type N, cw(c..) or ccw(c..) an arc to the next point about the centre after c; other vN are vias at no path point)
+1V1: C3.2 C4.2 C13.2 U2.23 U2.45 U2.50 | length 28.2
  Top Layer w0.2: C4.2@25.57,16.3 U2.45 v1(27.8,16.3) 27.868,16.3 28.252,15.916 28.252,14.752 v1(27.8,14.3) U2.50 26.425,14.3 ; U2.23 34.603,15.1 34.702,15.198 35.902,15.198 v1(36.3,14.8)
  Bottom Layer w0.2: C13.2 v1(27.8,16.3) ; v1(27.8,14.3) 27.793,14.293 25.767,14.293 25.767,12.033 26.1,11.7 34.8,11.7 36.3,13.2 v1(36.3,14.8)
+3V3: C2.2 C5.2 C6.2 C7.2 C8.2 C9.2 C10.2 C11.2 C12.2 C16.2 C17.2 J4.02 R3.2 U1.2 U1.4 U2.1 U2.10 U2.22 U2.33 U2.42 U2.43 U2.44 U2.48 U2.49 U3.8 | length 33.1
  Top Layer w0.2: C12.2 25.7,15.1 U2.48 ; C6.2 25.8,17.217 25.917,17.1 U2.43 v1(27.7,17.1) ; C11.2 v1(27.4,10.4) 27.4,10.445 27.7,10.745 U2.1 ; U2.49 U2.48 ; U2.44 27.535,16.7 27.652,16.817 27.652,17.052 v1(27.7,17.1) ; C7.2 27.7,19.01 U2.42 v1(27.7,17.1) ; v1(27.8,15.1) 27.275,15.1 U2.48 ; U2.10 31.3,10.303 v1(31.306,10.297) ; v1(31.3,17) U2.33 C9.2 ; U2.22 35.254,14.7 v1(35.3,14.746)
  Top Layer w0.6: C16.2 10.09,9.995 U3.8 11.7,9.995 v1(11.7,8.9)
  Top Layer w0.65: R3.2 v1(23.3,10)
  Top Layer w1.2: C17.2 J4.02
  Top Layer w1.6: U1.2 U1.4
  Bottom Layer w0.2: C5.2 v1(27.8,15.1)
  Bottom Layer w0.4: C8.2 26.86,17.75 26.86,17.344 27.094,17.11 27.69,17.11 v1(27.7,17.1)
  Bottom Layer w1.2: 3.2,24.9 C2.2
  other v1: 3.2,25.3
CS: R3.1 R4.2 U2.56 U3.1 | length 22.5
  Top Layer w0.2: R4.2 6.802,6.602 6.811,6.611 11.132,6.611 14.516,9.995 U3.1 R3.1@21.395,9.995 ; R3.1 21.419,10.021 21.419,10.519 21.863,10.963 24.222,10.963 25.159,11.9 U2.56
GND: C1.1 C2.1 C3.1 C4.1 C5.1 C6.1 C7.1 C8.1 C9.1 C10.1 C11.1 C12.1 C13.1 C14.2 C15.2 C16.1 C17.1 J1.5 J1.SH1 J1.SH2 J1.SH3 J1.SH4 J1.SH5 J1.SH6 J3.2 J4.01 J4.03 J4.05 J4.07 J4.09 J4.11 J4.13 J4.15 J4.17 J4.19 J4.21 J4.23 J4.25 J4.27 J4.29 J4.31 J4.33 J4.35 J4.36 J5.01 J5.03 J5.05 J5.07 J5.09 J5.11 J5.13 J5.15 J5.17 J5.19 J5.21 J5.23 J5.25 J5.27 J5.29 J5.31 J5.33 J5.35 J5.36 U1.1 U2.19 U2.57 U3.4 Y1.2 Y1.4 | length 18.4
  Top Layer w0.2: U2.19 34.869,13.5 34.921,13.448 v1(34.988,13.448)
  Top Layer w0.254: U3.4 20.301,13.805 20.506,13.6 v2(20.6,13.6)
  Top Layer w0.4: J1.5 5.65,15.1 J1.SH3 ; v1(8.4,10) C16.1 ; C1.1 v1(11.5,22.1) ; v1(23.9,15) C12.1 ; v1(23.9,16.3) C4.1 ; v1(25,10.4) C11.1 ; C6.1 v1(25.8,19.5) ; C7.1 v1(27.6,20.8) ; C9.1 v1(31.3,20.9) ; v1(37.8,16.8) C15.2 ; Y1.2 v1(42.2,13.2) ; C14.2 v1(40.8,11.9)
  Top Layer w0.6: v1(5.7,0.9) C17.1
  other v1: 1.2,1.5 1.2,3.9 6.2,9.1 52.3,10.4 50.2,10.5 6.2,10.6 42.2,10.6 44.4,10.6 46.3,10.6 0.8,11.5 7.6,11.6 42.2,11.9 46.3,12.5 44.4,12.6 50.3,12.6 52.3,12.6 7.6,13.3 29.3,13.6 30.3,13.6 31.3,13.6 42.3,14.3 44.4,14.3 46.3,14.3 29.3,14.5 30.3,14.5 31.3,14.5 36.9,14.8 7.6,14.9 2.8,15.375 29.3,15.4 30.3,15.4 31.3,15.4 36.9,15.5 9.8,15.6 11.9,15.6 42.3,16 44.4,16 46.3,16 36.9,16.2 36.9,16.9 2.8,17.425 42.3,17.6 44.4,17.6 46.3,17.6 13.5,18.2 16.8,18.2 10,18.3 42.3,19.3 44.4,19.3 46.3,19.3 50.2,19.4 52.2,19.4 20.4,20 22.6,20 24.8,20 10.1,20.2 13.5,20.2 16.8,20.2 40.367,20.217 36.4,20.8 46.3,20.9 50.2,20.9 52.2,20.9 44.4,21 42.3,21.1 13.5,21.7 16.8,21.7 20.4,21.7 22.6,21.7 24.8,21.7 1.3,21.95 37.9,22.1 50.2,22.4 52.2,22.4 13.237,25.315 6.7,27.6 0.6,27.7 6.7,29 0.6,29.1 0.9,31 6.4,31
GPIO0: J4.04 U2.2 | length 20.3
  Top Layer w0.2: J4.04 11.52,5.52 13.562,7.562 25.262,7.562 28.1,10.4 U2.2
GPIO1: J4.06 U2.3 | length 18.2
  Top Layer w0.2: J4.06 14.06,5.56 15.76,7.26 25.387,7.26 28.5,10.373 U2.3
GPIO2: J4.08 U2.4 | length 16.3
  Top Layer w0.2: J4.08 16.6,5.9 17.659,6.959 25.512,6.959 28.9,10.347 U2.4
GPIO3: J4.10 U2.5 | length 14
  Top Layer w0.2: J4.10 19.14,5.74 20.057,6.657 25.637,6.657 29.3,10.32 U2.5
GPIO4: J4.12 U2.6 | length 11.9
  Top Layer w0.2: J4.12 21.68,5.78 22.256,6.356 25.762,6.356 29.7,10.294 U2.6
GPIO5: J4.14 U2.7 | length 9.5
  Top Layer w0.2: J4.14 24.374,4.654 24.374,5.339 25.089,6.054 25.887,6.054 30.002,10.169 30.002,10.202 30.1,10.3 U2.7
GPIO6: J4.16 U2.8 | length 8.1
  Top Layer w0.2: J4.16 26.76,6.36 30.5,10.1 U2.8
GPIO7: J4.18 U2.9 | length 7.2
  Top Layer w0.2: J4.18 29.3,8.3 30.854,9.854 30.854,10.484 30.9,10.531 U2.9
GPIO8: J4.20 U2.11 | length 6.6
  Top Layer w0.2: U2.11 31.7,10.542 31.758,10.484 31.758,9.658 31.84,9.575 J4.20
GPIO9: J4.22 U2.12 | length 7.5
  Top Layer w0.2: U2.12 32.1,9.742 34.38,7.462 J4.22
GPIO10: J4.24 U2.13 | length 8.4
  Top Layer w0.2: U2.13 32.5,9.991 36.92,5.571 J4.24
GPIO11: J4.26 U2.14 | length 10.6
  Top Layer w0.2: U2.14 32.9,10.3 35.3,7.9 37.5,7.9 39.46,5.94 J4.26
GPIO12: J4.28 U2.15 | length 11.3
  Top Layer w0.2: U2.15 34.6,11.9 J4.28
GPIO13: J4.30 U2.16 | length 14
  Top Layer w0.2: U2.16 34.627,12.3 38.415,8.512 40.528,8.512 J4.30
GPIO14: J4.32 U2.17 | length 16.7
  Top Layer w0.2: U2.17 34.653,12.7 38.54,8.814 42.766,8.814 J4.32
GPIO15: J4.34 U2.18 | length 19.4
  Top Layer w0.2: U2.18 34.7,13.1 38.685,9.115 45.005,9.115 J4.34
GPIO16: J5.02 U2.27 | length 24.1
  Top Layer w0.2: U2.27 35.3,16.7 40.7,22.1 47.8,22.1 52.164,26.464 J5.02
GPIO17: J5.04 U2.28 | length 21.4
  Top Layer w0.2: U2.28 34.9,17.1 40.393,22.593 45.793,22.593 49.624,26.424 J5.04
GPIO18: J5.06 U2.29 | length 19.9
  Top Layer w0.2: U2.29 32.9,18.9 37.2,23.2 43.7,23.2 47.084,26.584 J5.06
GPIO19: J5.08 U2.30 | length 17.8
  Top Layer w0.2: U2.30 32.5,19.3 37.1,23.9 41.6,23.9 44.5,26.8 44.5,28.062 J5.08
GPIO20: J5.10 U2.31 | length 16
  Top Layer w0.2: U2.31 32.1,19.8 37,24.7 40,24.7 42.004,26.704 J5.10
GPIO21: J5.12 U2.32 | length 14.3
  Top Layer w0.2: U2.32 31.7,18.67 31.798,18.768 31.798,20.698 36.102,25.002 37.617,25.002 39.464,26.849 J5.12
GPIO22: J5.14 U2.34 | length 13.6
  Top Layer w0.2: U2.34 30.9,18.685 30.802,18.783 30.802,19.132 30.7,19.233 30.7,22 31.3,22.6 32.6,22.6 36.924,26.924 J5.14
GPIO23: J5.16 U2.35 | length 11.9
  Top Layer w0.2: U2.35 30.5,18.8 30.402,18.898 30.402,19.105 30.398,19.109 30.398,22.698 34.384,26.684 J5.16
GPIO24: J5.18 U2.36 | length 11.1
  Top Layer w0.2: U2.36 30.1,18.98 30.097,18.984 30.097,22.854 29.8,23.151 29.8,24.6 31.844,26.644 J5.18
GPIO25: J5.20 U2.37 | length 10.3
  Top Layer w0.2: J5.20 29.304,23.22 29.7,22.824 U2.37
GPIO26: J5.22 U2.38 | length 11.2
  Top Layer w0.2: J5.22 26.764,24.836 29.3,22.3 U2.38
GPIO27: J5.24 U2.39 | length 12.1
  Top Layer w0.2: J5.24 24.224,26.576 28.9,21.9 U2.39
GPIO28: J5.26 U2.40 | length 13.7
  Top Layer w0.2: J5.26 21.684,27.016 23.5,25.2 24.7,25.2 28.5,21.4 U2.40
GPIO29: J5.28 U2.41 | length 15.8
  Top Layer w0.2: J5.28 19.144,26.656 21.389,24.411 24.629,24.411 28.1,20.939 U2.41
IO0: U2.53 U3.5 | length 15.5
  Top Layer w0.2: U3.5 13.295,13.805 13.9,13.2 20.1,13.2 20.227,13.073 20.818,13.073 20.845,13.1 U2.53
IO1: U2.55 U3.2 | length 8.4
  Top Layer w0.2: U3.2 23.965,11.265 25,12.3 U2.55
IO2: U2.54 U3.3 | length 8
  Top Layer w0.2: U3.3 23.335,12.535 23.5,12.7 U2.54
IO3: U2.51 U3.7 | length 23.3
  Top Layer w0.2: U3.7 10.035,11.265 9.2,12.1 9.2,14.2 9.9,14.9 20.807,14.9 21.807,13.9 U2.51
NetJ3_1: J3.1 R4.1 | length 2.5
  Top Layer w0.65: J3.1 R4.1
QSPI_SCLK: U2.52 U3.6 | length 20.5
  Top Layer w0.2: U3.6 10.365,12.535 9.8,13.1 9.8,13.7 10.6,14.5 20.522,14.5 21.522,13.5 U2.52
RUN: J5.30 U2.26 | length 28.6
  Top Layer w0.2: U2.26 35.7,16.3 v1(36.3,16.9)
  Bottom Layer w0.2: J5.30 18.893,25.817 20.03,25.817 20.147,25.7 29.9,25.7 36.3,19.3 v1(36.3,16.9)
SWCLK: J5.32 U2.24 | length 40.7
  Top Layer w0.2: U2.24 v1(36.3,15.5)
  Bottom Layer w0.2: J5.32 12.97,29.2 11,29.2 10.3,28.5 10.3,27.1 13.6,23.8 30,23.8 35,18.8 35,16.3 35.8,15.5 v1(36.3,15.5)
SWD: J5.34 U2.25 | length 33.9
  Top Layer w0.2: U2.25 35.932,15.9 36.232,16.2 v1(36.3,16.2)
  Bottom Layer w0.2: J5.34 14.83,24.8 29.9,24.8 35.6,19.1 35.6,16.5 35.9,16.2 v1(36.3,16.2)
USB_D_N: J1.2 R2.2 | length 14.2
  Top Layer w0.306: J1.2 19.748,17.05 R2.2
USB_D_P: J1.3 R1.2 | length 14.5
  Top Layer w0.306: J1.3 5.95,16.4 6.094,16.544 19.054,16.544 19.615,15.983 19.617,15.983 19.798,15.802 R1.2
USB_RES_D_N: R2.1 U2.46 | length 6.6
  Top Layer w0.2: R2.1 20.802,17.098 21.036,16.864 21.038,16.864 21.352,16.55 22.325,16.55 23.073,15.802 26.2,15.802 26.298,15.9 U2.46
USB_RES_D_P: R1.1 U2.47 | length 6.6
  Top Layer w0.2: R1.1 20.802,15.802 21.036,16.036 21.038,16.036 21.251,16.248 22.2,16.248 22.46,15.988 22.948,15.5 26.2,15.5 U2.47
VBUS: C1.2 J1.1 U1.3 | length 7.6
  Top Layer w0.4: J1.1 6.4,17.7 6.8,18.1 6.8,19.7 5.916,20.584 5.916,21.934 U1.3
  Top Layer w0.65: U1.3 6.05,22.1 C1.2
XIN: C14.1 U2.20 Y1.1 | length 6.8
  Top Layer w0.2: U2.20 36.4,13.9 37.1,13.2 Y1.1
  Top Layer w0.4: Y1.1 37.9,12.134 38.134,11.9 C14.1
XOUT: C15.1 U2.21 Y1.3 | length 8.2
  Top Layer w0.2: U2.21 35.107,14.3 35.113,14.294 39.377,14.294 39.5,14.417 Y1.3
  Top Layer w0.4: Y1.3 C15.1@39.5,16.8
pads on no net: J1.4

## Polygon pours and split planes (outlines as drawn)
GND on Top Layer "NONET_L01_P001" (solid, remove dead copper, shelved, pour order 1): 0,32.8 56.7,32.8 56.7,0 0,0
GND on Layer 1 "NONET_L02_P000" (solid, remove dead copper, shelved, pour order 0): 0,32.8 56.7,32.8 56.7,0 0,0
+3V3 on Layer 2 "NONET_L03_P002" (solid, remove dead copper, shelved, pour order 2): 0,32.8 56.7,32.8 56.7,0 0,0
GND on Bottom Layer "NONET_L04_P003" (solid, remove dead copper, shelved, pour order 3): 0,32.8 56.7,32.8 56.7,0 0,0

## Keep-outs
Keep-Out Layer:
  the board outline again, w0.178

## Silkscreen, mask and mechanical layers (free items; w line width, h text height)
Top Overlay:
  drawing of 13 lines, arcs and shapes, not listed
  text "GND" at 8.6,26.3 h0.8 r270
  text "SWD" at 11.1,26.3 h0.8 r270
  text "SWCLK" at 13.7,26.3 h0.8 r270
  text "RUN" at 16.3,26.3 h0.8 r270
  text "GP29" at 18.8,26.3 h0.8 r270
  text "GP28" at 21.3,26.3 h0.8 r270
  text "GP27" at 23.9,26.3 h0.8 r270
  text "GP26" at 26.4,26.3 h0.8 r270
  text "GP25" at 28.9,26.3 h0.8 r270
  text "GP24" at 31.4,26.3 h0.8 r270
  text "GP23" at 34,26.3 h0.8 r270
  text "GP22" at 36.6,26.3 h0.8 r270
  text "GP21" at 39.1,26.3 h0.8 r270
  text "GP20" at 41.6,26.3 h0.8 r270
  text "GP19" at 44.2,26.3 h0.8 r270
  text "GP18" at 46.7,26.3 h0.8 r270
  text "GP17" at 49.3,26.3 h0.8 r270
  text "GP16" at 51.8,26.3 h0.8 r270
  text "Raspberry Pi RP2040" at 47.77,21.948 h0.6 r270
  text "BOOTSEL" at 0.6,10.2 h0.8 r270
  text "GP10" at 36.5,8.966 h0.8 r270
  text "GP12" at 41.6,8.966 h0.8 r270
  text "GP13" at 44.1,8.966 h0.8 r270
  text "GP14" at 46.6,8.966 h0.8 r270
  text "GP15" at 49.2,8.966 h0.8 r270
  text "GP11" at 39,8.7 h0.8 r270
  text "3V3" at 8.6,8.3 h0.8 r270
  text "GP0" at 11.2,8.3 h0.8 r270
  text "GP2" at 16.2,8.3 h0.8 r270
  text "GP3" at 18.8,8.3 h0.8 r270
  text "GP4" at 21.3,8.3 h0.8 r270
  text "GP5" at 23.8,8.3 h0.8 r270
  text "GP6" at 26.4,8.3 h0.8 r270
  text "GP7" at 28.9,8.3 h0.8 r270
  text "GP8" at 31.4,8.3 h0.8 r270
  text "GP9" at 34,8.3 h0.8 r270
  text "GND" at 51.8,8.3 h0.8 r270
  text "GP1" at 13.7,8.033 h0.8 r270